# Altium PCB Electrodos.PcbDoc
Units mm, origin at the board's own origin, x right, y up, seen from the top; angles counter-clockwise.
Board outline 77.6 x 32.51 mm, 2 copper layers (Top Layer, Bottom Layer); 4 components, 4 nets, 12 pads, 2 vias.
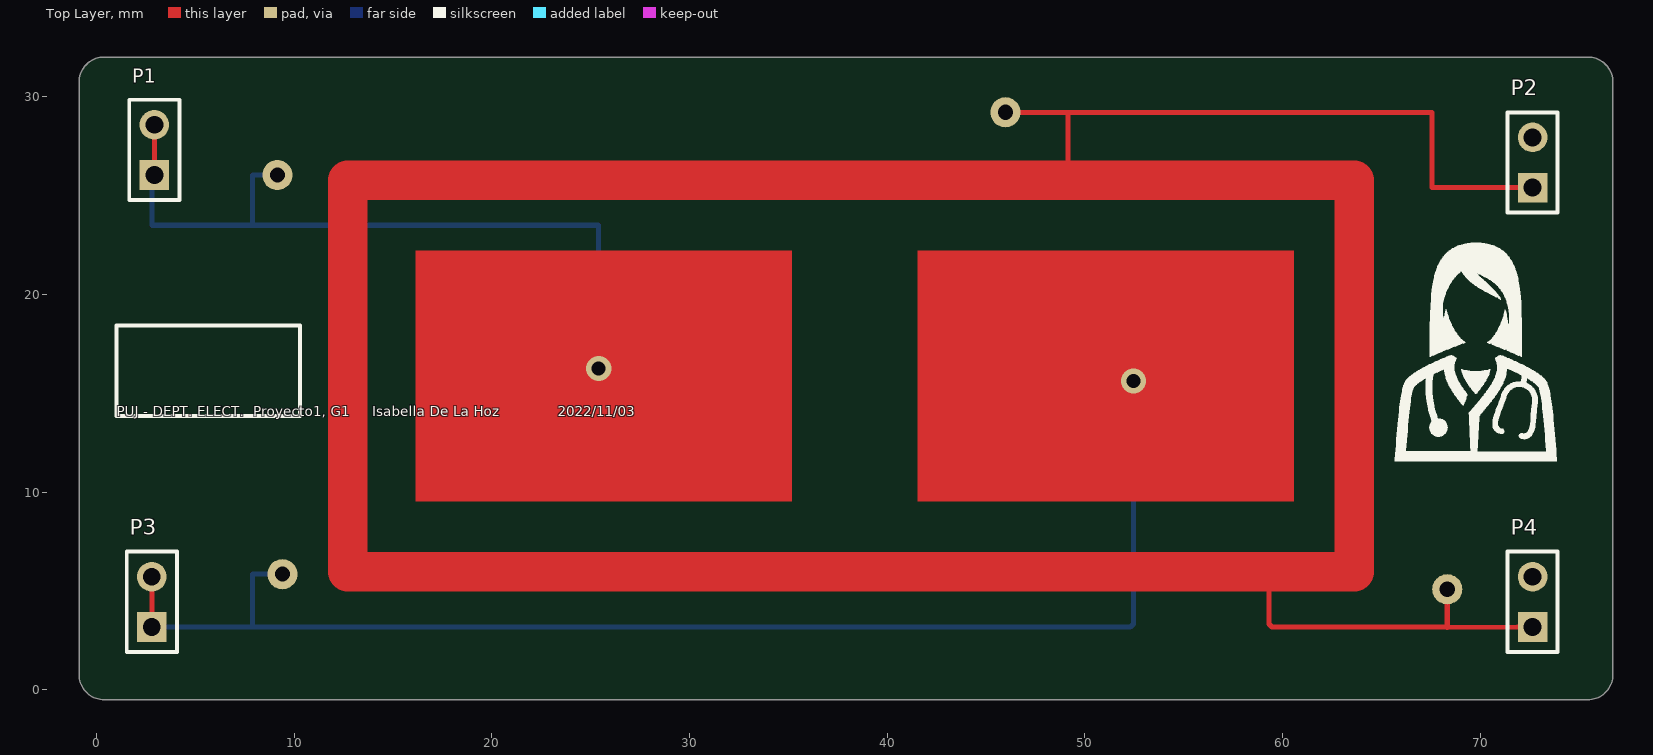
[diagram p0: Top Layer view]
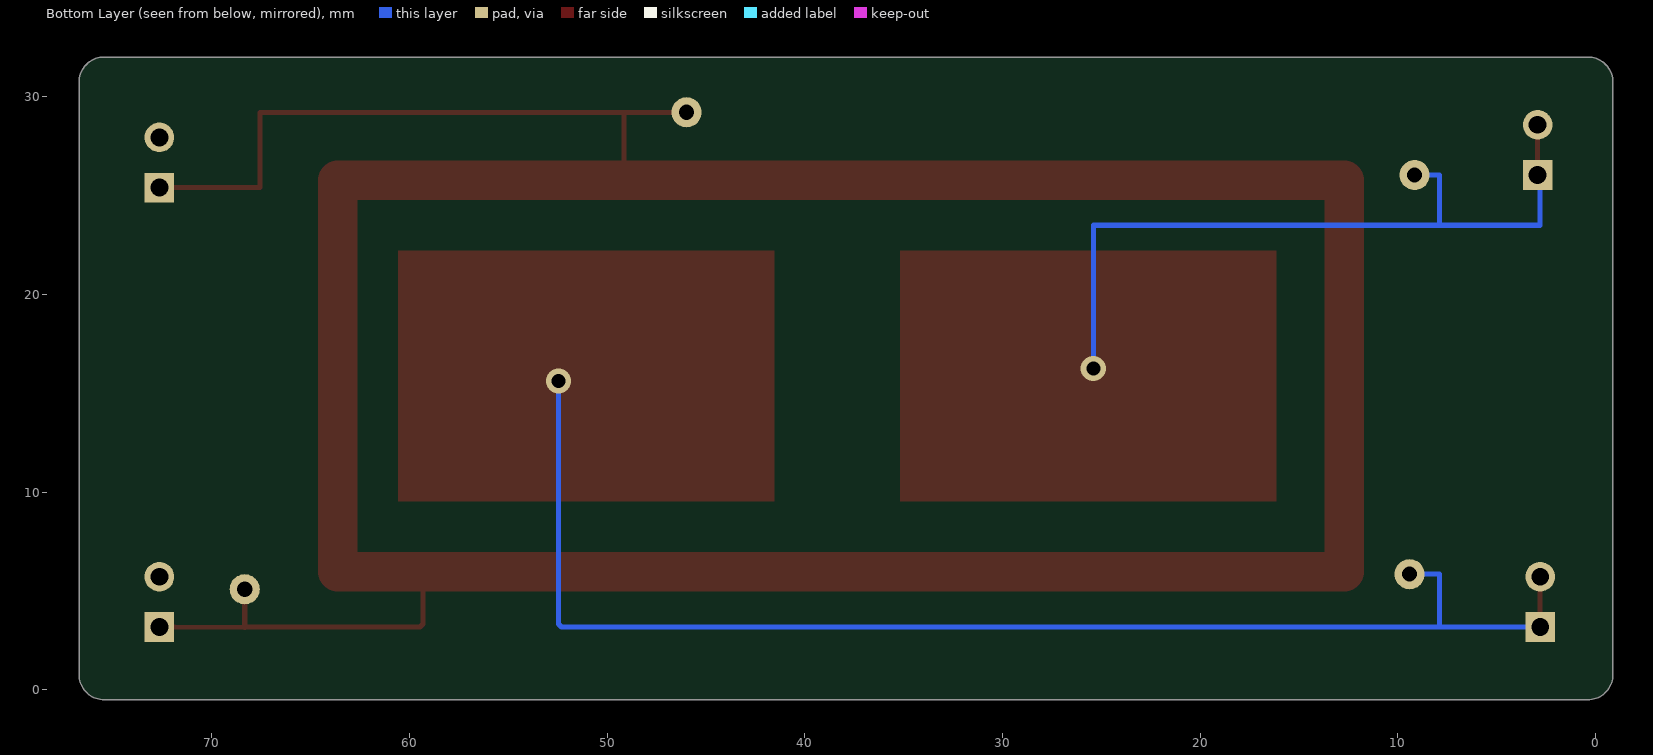
[diagram p1: Bottom Layer view, seen from below]

## Layer stack, top to bottom
Top Solder: solder mask 0.0102, Solder Resist, Dk 3.5
Top Layer: signal copper 0.0356
Dielectric 1: dielectric 0.32, FR-4, Dk 4.8
Bottom Layer: signal copper 0.0356
Bottom Solder: solder mask 0.0102, Solder Resist, Dk 3.5

## Board outline
-0.889,0.762 -0.889,30.734 cw(c0.381,30.734) 0.381,32.004 75.381,32.004 75.438,32.004 cw(c75.438,30.734) 76.708,30.734 76.708,0.762 cw(c75.438,0.762) 75.438,-0.508 0.381,-0.508 cw(c0.381,0.762)

## Design rules (kind name [scope] priority, off if disabled: settings)
Clearance [All] p1: gap=0.254 ignorepadtopadclearanceinfootprint=FALSE except(0: Arc-Hole Track-Hole SMDPad-Hole THPad-Hole Via-Hole Fill-Hole Poly-Hole Region-Hole Text-Hole)
PolygonConnect [All] p1: connectstyle=Relief reliefconductorwidth=0.254 reliefentries=4 polygonreliefangle="90 Angle" airgapwidth=0.254
RoutingVias [All] p1: holewidth=0.711 width=1.27 viastyle="Through Hole" minholewidth=0.711 minwidth=1.27 maxholewidth=0.711 maxwidth=1.27
SolderMaskExpansion [All] p1: expansion=0.102 istentingtop=FALSE
Width [All] p1: maxlimit=0.254 minlimit=0.254 preferedwidth=0.254
30 further rules are at their usual default settings.

## Components (designator, comment, footprint, x,y, rotation, side; value= is the part's Value field where it differs from the comment)
P1 "E+" HDR1X2 2.921,26.035 r90 top
P2 "VCC/2" HDR1X2 72.644,25.4 r90 top
P3 "VE-" HDR1X2 2.794,3.175 r90 top
P4 "Ground" HDR1X2 72.644,3.175 r90 top

## Footprints (in the part's own frame and the unit in brackets; to place one, negate y for a bottom-side part, rotate by r counter-clockwise, add the part's x,y. Pads: shape width x height; smd on the part's side, far side on the other; paste and mask are expansions set on the pad)
HDR1X2 [mm] "Connector; Header; 2 Position"
  rect 1.5x1.5 hole 0.9: 1(0,0)
  round 1.5 hole 0.9: 2(2.54,0)
  silkscreen extent -1.27,-1.27 3.81,1.27

## Part data
P1 P2 P3 P4: library part "Header 2", "Header, 2-Pin", Supplier Part Number 1=WM4111-ND, LatestRevisionDate=17-Jul-2002, LatestRevisionNote="Re-released for DXP Platform.", Publisher="Altium Limited", Supplier 1=Digi-Key

## Free pads (board coordinates)
  round 1.524 hole 0.762: 4(9.144,26.035) 6(9.398,5.842) 8(45.974,29.21) 10(68.326,5.08)

## Via types
v1: diameter 1.27, hole 0.711, Top Layer to Bottom Layer, 2 vias

## Nets (pads, with @x,y where several pads share a name; then routed paths per layer and width w, separated by ;. In a path a pad name is that pad's centre, name@x,y a point inside that pad or via, vN(x,y) a via of type N, cw(c..) or ccw(c..) an arc to the next point about the centre after c; other vN are vias at no path point)
GND: P4.1 pad.10 | length 4.9
  Top Layer w0.254: 68.326,3.136 68.326,3.139 ; pad.10@68.326,4.53 68.326,3.139 ; 71.882,3.175 68.326,3.139
NetP1_1: P1.1 P1.2 | length 51.8
  Top Layer w0.254: P1.1 P1.2
  Bottom Layer w0.254: 2.794,25.273 2.794,23.622 2.794,23.495 7.874,23.495 ; 8.509,26.035 7.874,26.035 7.874,23.495 ; 25.4,16.129 25.4,23.368 ; 7.874,23.495 23.241,23.495 25.4,23.495 ; 25.4,23.495 25.4,16.256 25.4,23.495
NetP2_1: P2.1 | length 33.2
  Top Layer w0.254: 46.609,29.21 49.149,29.21 ; 49.149,26.67 49.149,28.718 ; 49.149,27.162 49.149,29.21 ; 71.882,25.4 71.12,25.4 67.564,25.4 67.564,29.21 49.149,29.21
NetP3_1: P3.1 P3.2 | length 67.6
  Top Layer w0.254: P3.1 P3.2
  Bottom Layer w0.254: 3.556,3.175 18.034,3.175 52.302,3.175 52.451,3.324 52.451,15.621 ; 7.874,3.175 7.874,5.842 9.017,5.842
pads on no net: P2.2 P4.2
copper on no net: | length 157.3
  Top Layer w0.254: 59.309,5.969 59.309,3.324 59.458,3.175 68.326,3.175 ; 49.149,26.67 49.149,28.718 49.149,26.67
  Top Layer w2: 12.7,5.969 63.627,5.969 63.627,25.781 12.7,25.781 12.7,5.969
  other v1: 52.451,15.621 25.4,16.256

## Other copper
Top Layer:
  rectangle: 41.529,9.525 60.579,22.225
  rectangle net NetP1_1: 16.129,9.525 35.179,22.225

## Silkscreen, mask and mechanical layers (free items; w line width, h text height)
Top Overlay:
  drawing of 7 lines, arcs and shapes, not listed
  text "PUJ - DEPT. ELECT.  Proyecto1, G1     Isabella De La Hoz             2022/11/03" at 1.016,13.843 h0.5
Mechanical 1:
  lines w0.254: -0.889,30.734 cw(c0.381,30.734) 0.381,32.004 75.381,32.004 ; -0.889,30.762 -0.889,0.762 ccw(c0.381,0.762) 0.381,-0.508 75.381,-0.508 ; 75.438,-0.508 ccw(c75.438,0.762) 76.708,0.762 76.708,30.762 ; 75.438,32.004 cw(c75.438,30.734) 76.708,30.734